# EAGLE board board (EAGLE 6.5.0)
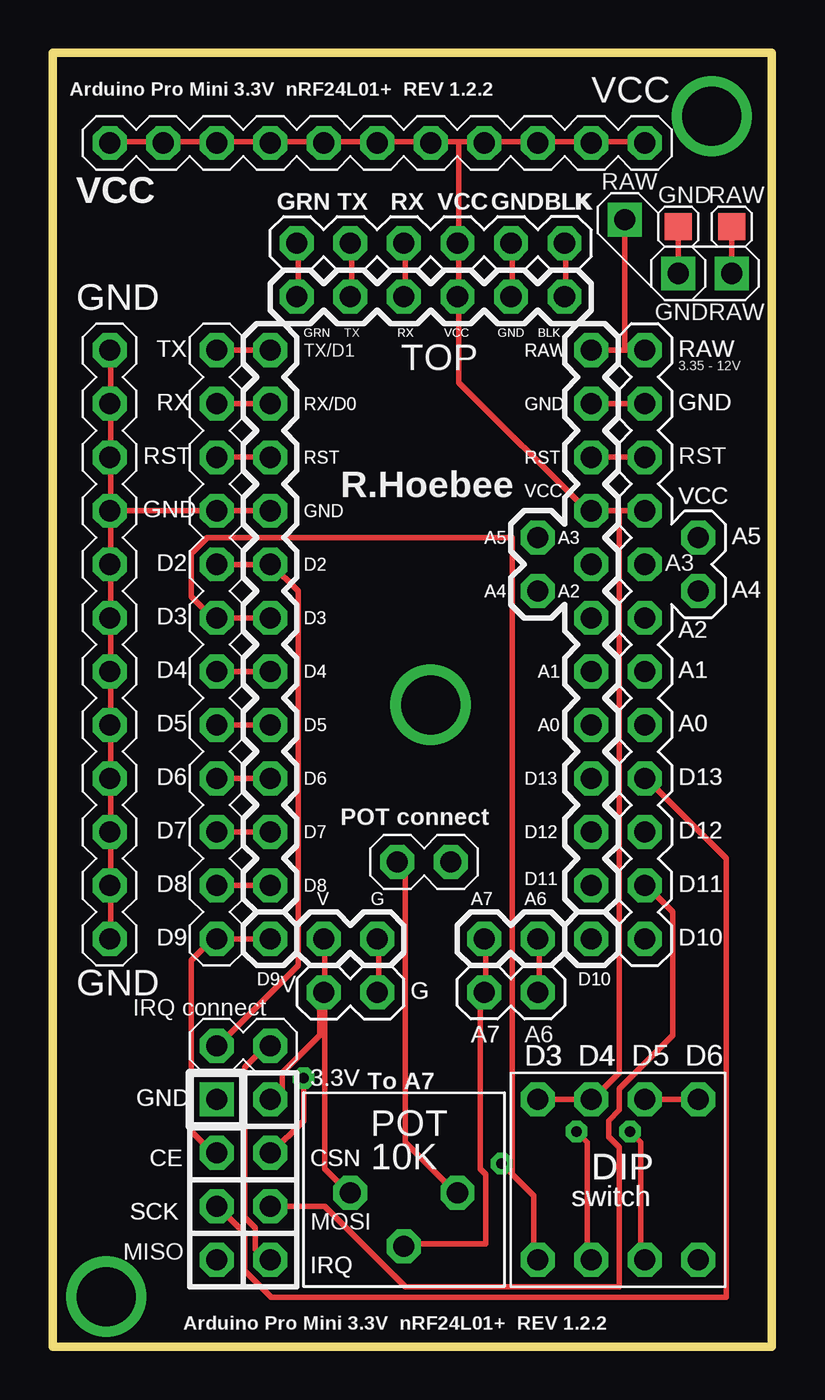
[diagram p0: board, top side]
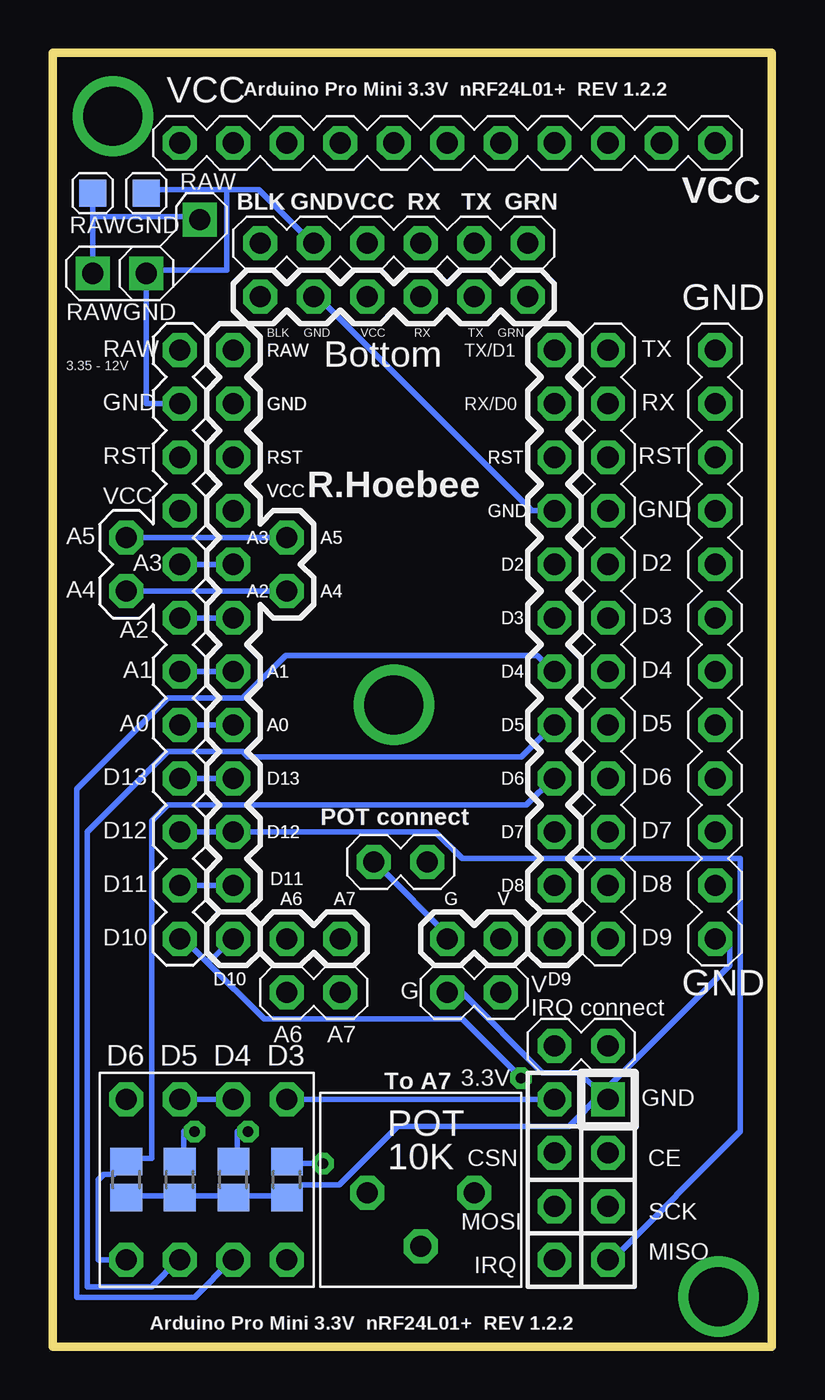
[diagram p1: board, bottom side, seen from below]

Size 34.13 x 61.44 mm. Coordinates in mm from the lower left corner, seen from the top.
Outline: 0,61.44 0,0 34.13,0 34.13,61.44 0,61.44
Copper layers (1*16): Top 0.0356mm / dielectric 1.5011mm / Bottom 0.0356mm
Design rules "SparkFun_oshpark": minimum track width 10mil, minimum drill 20mil, track to track 10mil, track to pad 10mil, pad to pad 10mil, via to via 10mil, smd to smd 10mil, copper to edge 15mil, drill to drill 10mil, minimum pad ring 12mil, minimum via ring 10mil, stop-mask expansion 3mil, vias tented up to drill 0mil, thermal gap 10mil

## Footprints (pad centres in the part's own frame; a part is rotated, then mirrored left to right if it is on the bottom)
ARDUINO_PRO_MINI_3.3V = drill 1 octagon: A0 -4.128,-2.54; A1 -4.128,0; A2 -4.128,2.54; A3 -4.128,5.08; A4 -6.668,3.81; A5 -6.668,6.35; A6 -6.668,-12.7; A7 -9.207,-12.7; BLK -5.397,17.78; D2 -19.367,5.08; D3 -19.367,2.54; D4 -19.367,0; D5 -19.367,-2.54; D6 -19.367,-5.08; D7 -19.367,-7.62; D8 -19.367,-10.16; D9 -19.367,-12.7; D10 -4.128,-12.7; D11 -4.128,-10.16; D12 -4.128,-7.62; D13 -4.128,-5.08; G -14.287,-12.7; GND_0 -4.128,12.7; GND_1 -19.367,7.62; GND_2 -7.938,17.78; GRN -18.098,17.78; RAW -4.128,15.24; RST_0 -4.128,10.16; RST_1 -19.367,10.16; RX -13.018,17.78; RX/D1 -19.367,12.7; TX -15.557,17.78; TX/D0 -19.367,15.24; V -16.828,-12.7; VCC_0 -4.128,7.62; VCC_1 -10.477,17.78
12_PIN_HEADER = drill 1 octagon: 1 0,12.7; 2 0,10.16; 3 0,7.62; 4 0,5.08; 5 0,2.54; 6 0,0; 7 0,-2.54; 8 0,-5.08; 9 0,-7.62; 10 0,-10.16; 11 0,-12.7; 12 0,-15.24
12_2_HEADER = drill 1 octagon: 1 -2.54,10.16; 2 -2.54,7.62; 3 -2.54,5.08; 4 -2.54,2.54; 5 -2.54,0; 6 -2.54,-2.54; 7 -2.54,-5.08; 8 -2.54,-7.62; 9 -2.54,-10.16; 10 -2.54,-12.7; 11 -2.54,-15.24; 12 -2.54,-17.78; 13 0,1.27; 14 0,-1.27
NRF24L01-3 = drill 1 octagon: 3.3V 1.27,3.651; CE -1.27,1.111; CSN 1.27,1.111; IRQ 1.27,-3.969; MISO -1.27,-3.969; MOSI 1.27,-1.429; SCK -1.27,-1.429 | drill 1 square: GND -1.27,3.651
6_PIN_HEADER = drill 1 octagon: 1 -6.032,1.587; 2 -3.493,1.587; 3 -0.953,1.587; 4 1.587,1.587; 5 4.128,1.587; 6 6.668,1.587
2_SPACE_2_HEADER = drill 1 octagon: 1 -3.81,0; 2 -1.27,0; 3 3.81,0; 4 6.35,0
18650_HOLDER_FITTED = drill 2.8: P$1 -5.08,0.635
11_PIN_HEADER = drill 1 octagon: P$1 0,11.43; P$2 0,8.89; P$3 0,6.35; P$4 0,3.81; P$5 0,1.27; P$6 0,-1.27; P$7 0,-3.81; P$8 0,-6.35; P$9 0,-8.89; P$10 0,-11.43; P$11 0,-13.97
2_PIN_HEADER = drill 1 octagon: 1 -1.27,5.08; 2 -1.27,2.54
4-DIP = smd 1.5 x 1.3 bottom: D3 -3.81,0.532; D4 -1.27,0.532; D5 1.27,0.532; D6 3.81,0.532; GND_1 -3.81,-1.167; GND_2 -1.27,-1.167; GND_3 1.27,-1.167; GND_4 3.81,-1.167 | drill 1 octagon: OFF_1 -3.81,-4.128; OFF_2 -1.27,-4.128; OFF_3 1.27,-4.128; OFF_4 3.81,-4.128; VCC_1 -3.81,3.493; VCC_2 -1.27,3.493; VCC_3 1.27,3.493; VCC_4 3.81,3.493
18650_BATT_CONECT = drill 1 square: GND 2.54,7.62; RAW 5.08,7.62; RAW_3 0,10.16 | smd 1.27 x 1.27: GND_1 2.54,9.842; RAW_1 5.08,9.842 | smd 1.27 x 1.27 bottom: GND_2 2.54,11.43; RAW_2 5.08,11.43
POT_10K = drill 1 octagon: CCW 2.54,-0.318; CW -2.54,-0.318; WIPER 0,-2.857

## Placement (x,y rotation side)
U$1  ARDUINO_PRO_MINI_3.3V  [ARDUINO_PRO_MINI_3.3V]  29.69,32.07 0 top
U$2  [12_PIN_HEADER]  7.78,34.61 0 top
U$3  12_2_HEADER  [12_2_HEADER]  30.64,37.15 0 top
U$4  NRF2L01-3  [NRF24L01-3]  9.05,8.1 0 top
U$5  6_PIN_HEADER  [6_PIN_HEADER]  17.62,50.8 0 top
U$6  2_SPACE_2_HEADER  [2_SPACE_2_HEADER]  16.67,16.83 0 top
U$7  18650_HOLDER_FITTED  [18650_HOLDER_FITTED]  23.02,29.85 0 top
U$8  [12_PIN_HEADER]  2.7,34.61 0 top
U$9  11_PIN_HEADER  [11_PIN_HEADER]  14.13,57.15 90 top
U$10  2_PIN_HEADER  [2_PIN_HEADER]  5.24,13.02 270 top
U$11  [4-DIP]  26.83,8.25 0 top
U$12  18650_BATT_CONECT  [18650_BATT_CONECT]  27.15,43.34 0 top
U$13  [POT_10K]  16.67,7.62 0 top
U$14  2_PIN_HEADER  [2_PIN_HEADER]  13.81,21.75 270 top

## Library data of the parts
U$1 = arduino_pro_mini_3.3v
U$2 U$8 = 12_pin_header
U$3 = 12_2_HEADER
U$4 = nrf24l01_connection
U$5 = 6_pin_header
U$6 = 2_space_2_header
U$7 = 18650_holder_fitted_v2
U$9 = 11_pin_header
U$10 U$14 = 2_PIN_HEADER
U$11 = DIPS_Arduino
U$12 = 18650_batt_connect
U$13 = pot_10k

## Nets
BLK: U$1.BLK U$5.6
GND: U$1.G U$1.GND_0 U$1.GND_1 U$1.GND_2 U$2.4 U$3.2 U$4.GND U$5.5 U$6.2 U$8.1 U$8.2 U$8.3 U$8.4 U$8.5 U$8.6 U$8.7 U$8.8 U$8.9 U$8.10 U$8.11 U$8.12 U$11.GND_1 U$11.GND_2 U$11.GND_3 U$11.GND_4 U$12.GND U$12.GND_1 U$12.GND_2 U$14.1
GRN: U$1.GRN U$5.1
N$1: U$1.TX/D0 U$2.1
N$2: U$1.RX/D1 U$2.2
N$3: U$1.RST_1 U$2.3
N$4: U$1.RX U$5.3
N$5: U$4.IRQ U$10.1
N$6: U$1.RAW U$3.1 U$12.RAW U$12.RAW_1 U$12.RAW_2 U$12.RAW_3
N$10: U$13.CCW U$14.2
N$11: U$1.D4 U$2.7 U$11.D4 U$11.OFF_2
N$12: U$1.D9 U$2.12 U$4.CE
N$13: U$1.D10 U$3.12 U$4.CSN
N$14: U$1.D11 U$3.11 U$4.MOSI
N$15: U$1.D12 U$3.10 U$4.MISO
N$17: U$1.RST_0 U$3.3
N$18: U$1.A3 U$3.5
N$19: U$1.A2 U$3.6
N$20: U$1.A1 U$3.7
N$21: U$1.A0 U$3.8
N$22: U$1.A5 U$3.13
N$23: U$1.A4 U$3.14
N$25: U$1.D2 U$2.5 U$10.2
N$26: U$1.A7 U$6.3 U$13.WIPER
N$28: U$1.D3 U$2.6 U$11.D3 U$11.OFF_1
N$29: U$1.D5 U$2.8 U$11.D5 U$11.OFF_3
N$30: U$1.D6 U$2.9 U$11.D6 U$11.OFF_4
N$31: U$1.D7 U$2.10
N$32: U$1.D8 U$2.11
N$33: U$1.A6 U$6.4
N$37: U$1.D13 U$3.9 U$4.SCK
TX: U$1.TX U$5.2
VCC: U$1.V U$1.VCC_0 U$1.VCC_1 U$3.4 U$4.3.3V U$5.4 U$6.1 U$9.P$1 U$9.P$2 U$9.P$3 U$9.P$4 U$9.P$5 U$9.P$6 U$9.P$7 U$9.P$8 U$9.P$9 U$9.P$10 U$9.P$11 U$11.VCC_1 U$11.VCC_2 U$11.VCC_3 U$11.VCC_4 U$13.CW

## Tracks (layer width: path | path; a pad name or v marks a point on that pad's centre or on a via)
BLK
  Top 0.254: U$1.BLK 24.35,49.85 24.35,52.39 U$5.6
GND
  Top 0.254: U$1.G 15.46,19.37 15.46,16.83 U$6.2 | U$1.GND_2 21.81,49.85 21.81,52.39 U$5.5 | U$12.GND U$12.GND_1 | U$3.2 U$1.GND_0 | U$1.GND_1 U$2.4 2.76,39.69 | 2.76,44.77 2.76,47.31 U$8.1 | 2.76,42.23 2.76,39.69 | 2.76,37.15 2.76,34.61 | 2.76,32.07 2.76,29.53 | 2.76,21.91 2.76,19.37 U$8.12 | 2.76,26.99 2.76,24.45 | 2.76,24.45 2.76,21.91 | 2.76,21.91 U$8.11 | 2.76,24.45 U$8.10 | 2.76,26.99 2.76,29.53 | 2.76,29.53 U$8.8 | 2.76,26.99 U$8.9 | 2.76,32.07 2.76,34.61 | 2.76,34.61 U$8.6 | 2.76,32.07 U$8.7 | 2.76,37.15 2.76,39.69 | 2.76,37.15 U$8.5 | 2.76,42.23 2.76,44.77 | 2.76,44.77 U$8.2 | 2.76,42.23 U$8.3 | 2.76,39.69 U$8.4
  Bottom 0.254: U$11.GND_4 30.45,7.18 28.16,7.18 U$11.GND_3 27.91,7.18 25.62,7.18 U$11.GND_2 25.37,7.18 23.08,7.18 U$11.GND_1 22.83,7.18 22.32,7.68 20.54,7.68 17.75,10.48 9.62,10.48 8.1,12 | 8.1,12 9.11,13.02 10.89,13.02 14.7,16.83 U$6.2 | 8.1,12 7.84,11.75 U$4.GND 8.1,12 | U$14.1 18.76,22.92 15.21,19.37 U$1.G | 25.88,54.93 24.35,54.93 21.81,52.39 U$5.5 | 25.88,54.93 29.69,54.93 U$12.GND_2 | U$3.2 29.69,44.77 U$12.GND 29.69,51.12 25.88,51.12 25.88,54.93 | U$1.GND_1 11.4,39.69 21.56,49.85 U$1.GND_2 | 8.1,12 2,18.1 2,19.37 U$8.12
GRN
  Top 0.254: U$1.GRN 11.65,49.85 11.65,52.39 U$5.1
N$1
  Top 0.254: U$1.TX/D0 U$2.1
N$2
  Top 0.254: U$1.RX/D1 U$2.2
N$3
  Top 0.254: U$1.RST_1 U$2.3
N$4
  Top 0.254: U$1.RX 16.73,49.85 16.73,52.39 U$5.3
N$5
  Top 0.254: U$4.IRQ 10.13,4.13 9.62,4.64 9.62,5.65 9.11,6.16 9.11,13.27 10.13,14.29 U$10.1
N$6
  Top 0.254: U$3.1 27.15,47.31 | 27.15,47.31 U$1.RAW | U$12.RAW U$12.RAW_1 | U$12.RAW_3 27.15,47.31
  Bottom 0.254: U$12.RAW 32.23,53.66 | 32.23,53.66 U$12.RAW_2 | 32.23,53.66 27.15,53.66 U$12.RAW_3
N$7  (via drill 2.8)
  other vias: 31.27,58.42
N$8  (via drill 2.8)
  other vias: 2.54,2.38
N$10
  Top 0.254: U$13.CCW 19.02,7.43 16.73,9.72 16.73,22.67 16.48,22.92 U$14.2
N$11  (via drill 0.51)
  Top 0.254: U$1.D4 U$2.7 | v24.86,10.22 25.37,9.72 25.37,4.13 U$11.OFF_2
  Bottom 0.254: v24.86,10.22 25.37,10.22 25.37,8.95 U$11.D4 | U$1.D4 10.38,32.07 11.14,32.83 23.08,32.83 25.11,30.8 28.67,30.8 32.99,26.48 32.99,2.35 27.4,2.35 25.62,4.13 U$11.OFF_2
N$12
  Top 0.254: U$4.CE 7.59,9.21 6.57,10.22 6.57,18.35 7.59,19.37 U$2.12 U$1.D9
N$13  (via drill 0.51)
  Top 0.254: v11.91,12.76 11.91,10.73 10.38,9.21 U$4.CSN
  Bottom 0.254: v11.91,12.76 14.7,15.56 24.1,15.56 26.89,18.35 | 26.89,18.35 27.91,19.37 U$3.12 | 26.89,18.35 26.64,18.35 25.62,19.37 U$1.D10
N$14
  Top 0.254: U$4.MOSI 12.92,6.67 16.73,2.86 26.89,2.86 26.89,9.46 26.38,9.97 26.38,10.73 26.89,11.24 26.89,12.26 29.43,14.8 29.43,20.64 28.16,21.91 U$3.11
  Bottom 0.254: U$3.11 U$1.D11
N$15
  Bottom 0.254: U$4.MISO 7.59,4.13 1.49,10.22 1.49,23.18 14.7,23.18 15.97,24.45 U$1.D12 U$3.10
N$17
  Top 0.254: U$3.3 U$1.RST_0
N$18
  Bottom 0.254: U$3.5 U$1.A3
N$19
  Bottom 0.254: U$3.6 U$1.A2
N$20
  Bottom 0.254: U$3.7 U$1.A1
N$21
  Bottom 0.254: U$3.8 U$1.A0
N$22
  Bottom 0.254: U$3.13 U$1.A5
N$23
  Bottom 0.254: U$3.14 U$1.A4
N$25
  Top 0.254: U$10.2 7.84,14.29 11.65,18.1 11.65,35.88 10.38,37.15 U$1.D2 U$2.5
N$26
  Top 0.254: U$13.WIPER 16.73,4.89 20.54,4.89 20.54,8.19 20.29,8.45 20.29,16.83 U$6.3 20.54,16.83 20.54,19.37 U$1.A7
N$28  (via drill 0.51)
  Top 0.254: U$1.D3 U$2.6 7.59,34.61 6.57,35.62 6.57,37.66 7.33,38.42 21.81,38.42 21.81,8.19 | 21.81,8.19 22.83,7.18 22.83,4.13 U$11.OFF_1 | 21.81,8.19 v21.3,8.7
  Bottom 0.254: v21.3,8.7 22.83,8.7 U$11.D3
N$29  (via drill 0.51)
  Top 0.254: U$1.D5 U$2.8 | v27.4,10.22 27.91,9.72 27.91,4.13 U$11.OFF_3
  Bottom 0.254: v27.4,10.22 27.91,10.22 27.91,8.95 U$11.D5 | U$1.D5 10.38,29.53 11.91,28 24.86,28 25.11,28.26 28.67,28.26 32.48,24.45 32.48,2.86 29.43,2.86 28.16,4.13 U$11.OFF_3
N$30
  Top 0.254: U$1.D6 U$2.9
  Bottom 0.254: U$11.OFF_4 31.97,4.13 31.97,7.94 31.72,8.19 31.21,8.19 30.7,8.7 U$11.D6 30.45,8.95 29.43,8.95 29.43,24.96 28.67,25.72 11.65,25.72 10.38,26.99 U$1.D6
N$31
  Top 0.254: U$1.D7 U$2.10
N$32
  Top 0.254: U$1.D8 U$2.11
N$33
  Top 0.254: U$6.4 23.08,16.83 23.08,19.37 U$1.A6
N$37
  Top 0.254: U$4.SCK 7.84,6.67 9.11,5.4 9.11,3.62 10.38,2.35 31.97,2.35 31.97,23.18 28.16,26.99 U$3.9
  Bottom 0.254: U$3.9 U$1.D13
TX
  Top 0.254: U$1.TX 14.19,49.85 14.19,52.39 U$5.2
VCC
  Top 0.254: U$11.VCC_1 U$11.VCC_2 25.62,11.75 26.89,13.02 26.89,39.69 | U$11.VCC_4 U$11.VCC_3 | U$4.3.3V 10.38,11.75 10.89,12.26 10.89,13.02 12.67,14.8 12.67,16.83 U$6.1 12.92,16.83 | 12.92,16.83 12.92,19.37 U$1.V | 12.92,16.83 12.92,8.45 13.94,7.43 U$13.CW | U$9.P$11 27.91,57.21 25.62,57.21 U$9.P$10 25.37,57.21 23.08,57.21 U$9.P$9 22.83,57.21 20.54,57.21 U$9.P$8 20.29,57.21 19.27,57.21 | U$3.4 26.89,39.69 | 26.89,39.69 U$1.VCC_0 25.37,39.69 19.27,45.78 19.27,49.85 | 19.27,52.39 19.27,49.85 | 19.27,57.21 18,57.21 U$9.P$7 17.75,57.21 15.46,57.21 U$9.P$6 15.21,57.21 12.92,57.21 U$9.P$5 12.67,57.21 10.38,57.21 U$9.P$4 10.13,57.21 7.84,57.21 U$9.P$3 7.59,57.21 5.3,57.21 U$9.P$2 5.05,57.21 2.76,57.21 U$9.P$1 | 19.27,57.21 19.27,52.39 | 19.27,52.39 U$5.4 | 19.27,49.85 U$1.VCC_1
  Bottom 0.254: U$11.VCC_3 U$11.VCC_2 | U$4.3.3V U$11.VCC_1

## Text on the board
tPlace: Arduino Pro Mini 3.3V nRF24L01+ REV 1.2.2 | VCC | VCC | VCC | VCC | GRN | GRN | TX | TX | RX | RX | VCC | VCC | GND | GND | BLK | BLK | GND | GND | TX | TX | RAW | RAW | TOP | 3.35 - 12V | RX | RX | GND | GND | RST | RST | RST | R.Hoebee | VCC | VCC | GND | GND | A5 | A5 | D2 | D2 | A3 | A4 | A4 | D3 | D3 | A2 | A2 | D4 | D4 | A1 | A1 | D5 | D5 | A0 | A0 | D6 | D6 | D13 | D13 | POT connect | D7 | D7 | D12 | D12 | D8 | D8 | D11 | D11 | D9 | D9 | D10 | D10 | V | GND | G | G | IRQ connect | A7 | A7 | A6 | To A7 | Arduino Pro Mini 3.3V nRF24L01+ REV 1.2.2
bPlace: Arduino Pro Mini 3.3V nRF24L01+ REV 1.2.2 | VCC | VCC | GRN | TX | RX | VCC | GND | BLK | GND | TX | RAW | Bottom | 3.35 - 12V | RX | GND | RST | RST | R.Hoebee | VCC | GND | A5 | D2 | A3 | A4 | D3 | A2 | D4 | A1 | D5 | A0 | D6 | D13 | POT connect | D7 | D12 | D8 | D11 | D9 | D10 | V | GND | G | IRQ connect | A7 | A6 | To A7 | Arduino Pro Mini 3.3V nRF24L01+ REV 1.2.2